# Altium PCB Adapter_MPCIe_to_M2_E.PcbDoc
Units mm, origin at the board's own origin, x right, y up, seen from the top; angles counter-clockwise.
Board outline 50.95 x 30 mm, 4 copper layers (01_Top, 02_GND, 03_GND, 04_Bottom), stack 1.002 mm thick; 26 components, 38 nets, 200 pads, 585 vias.
Unrouted connection lines stored in the file: 36.
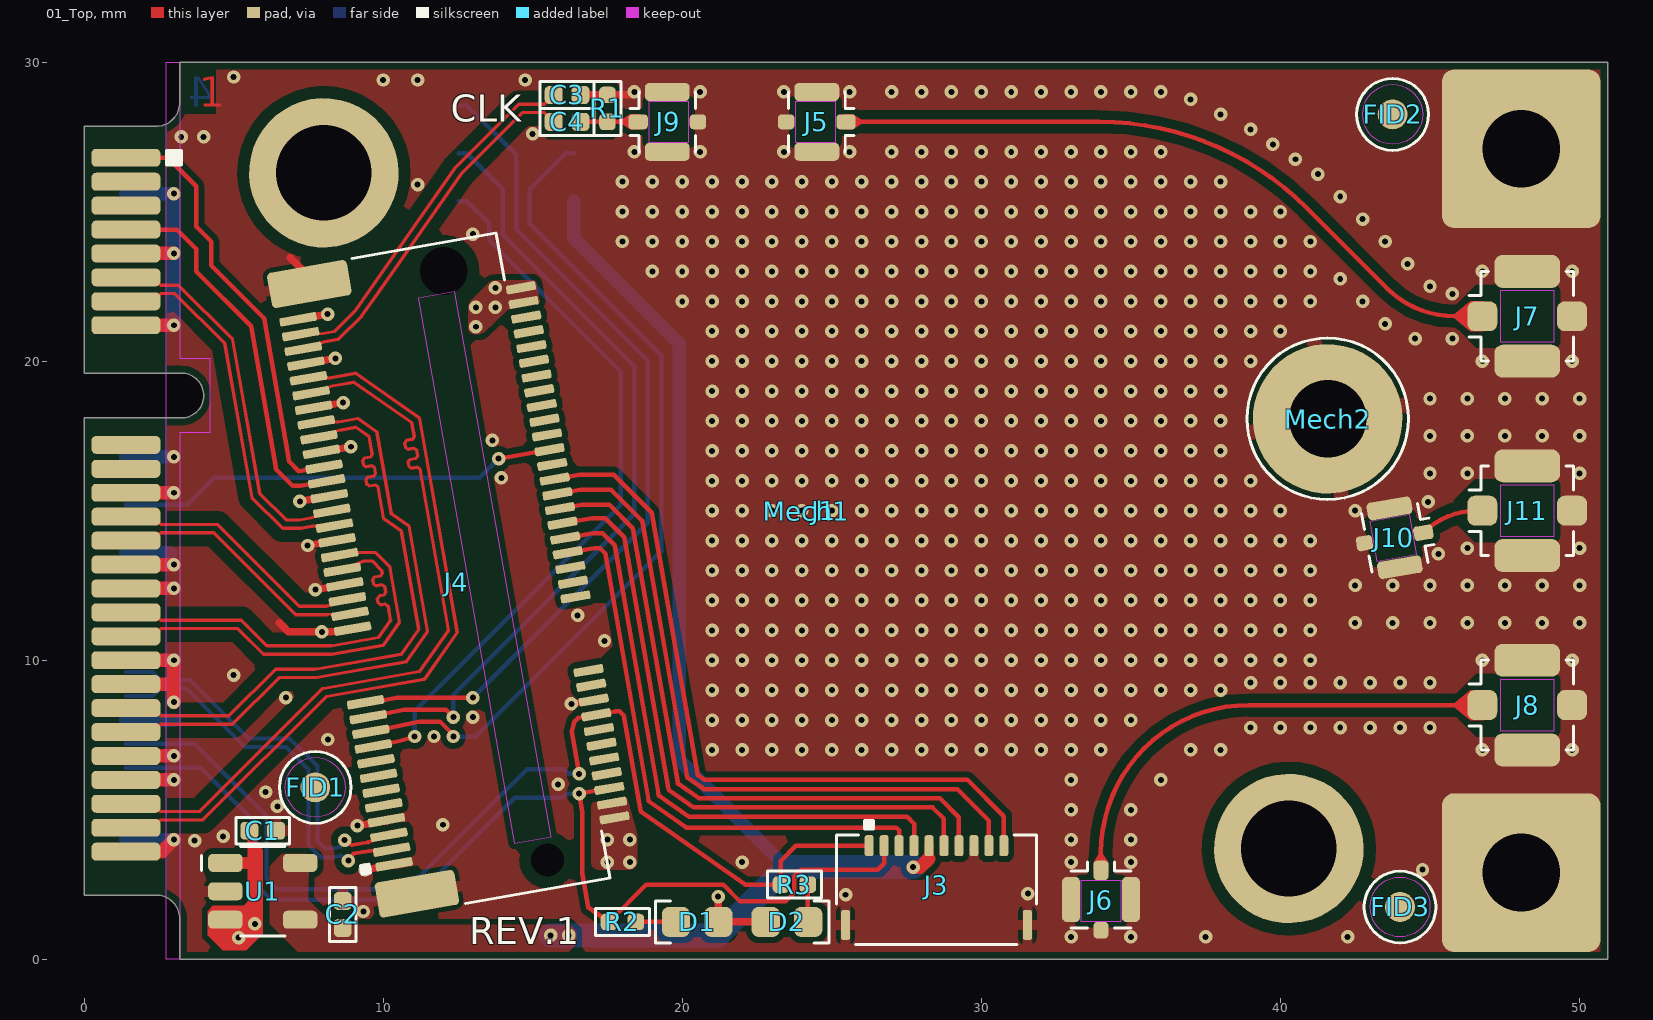
[diagram p0: 01_Top view]
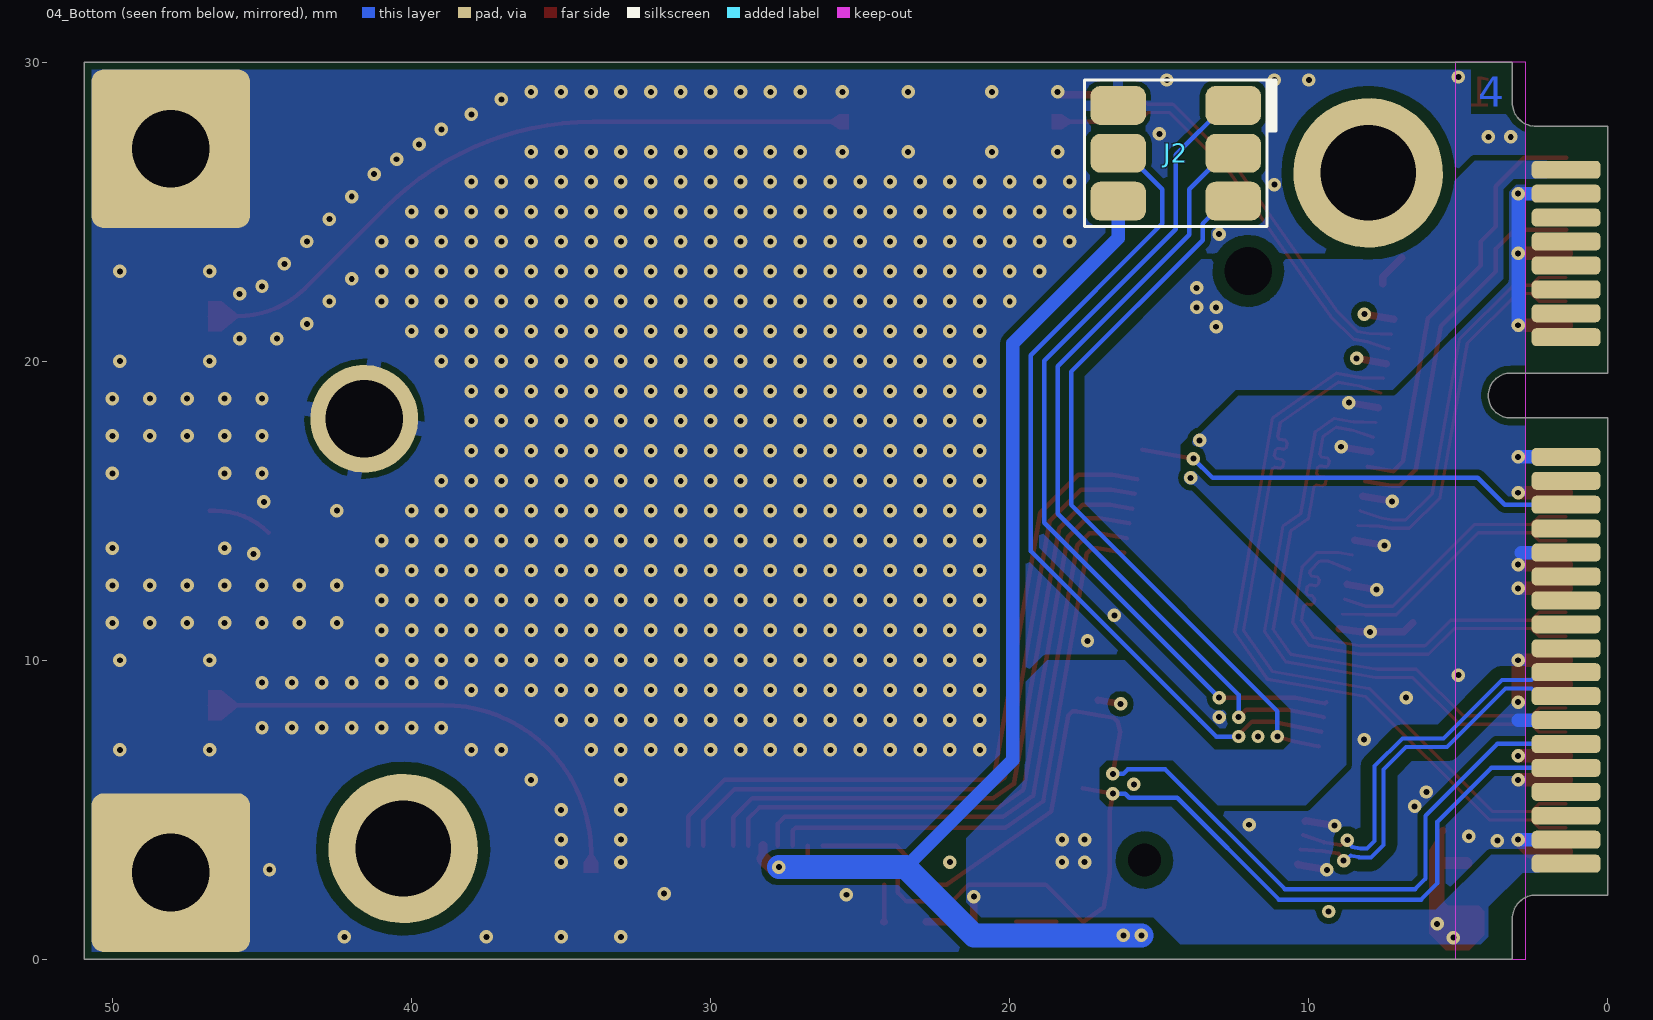
[diagram p1: 04_Bottom view, seen from below]
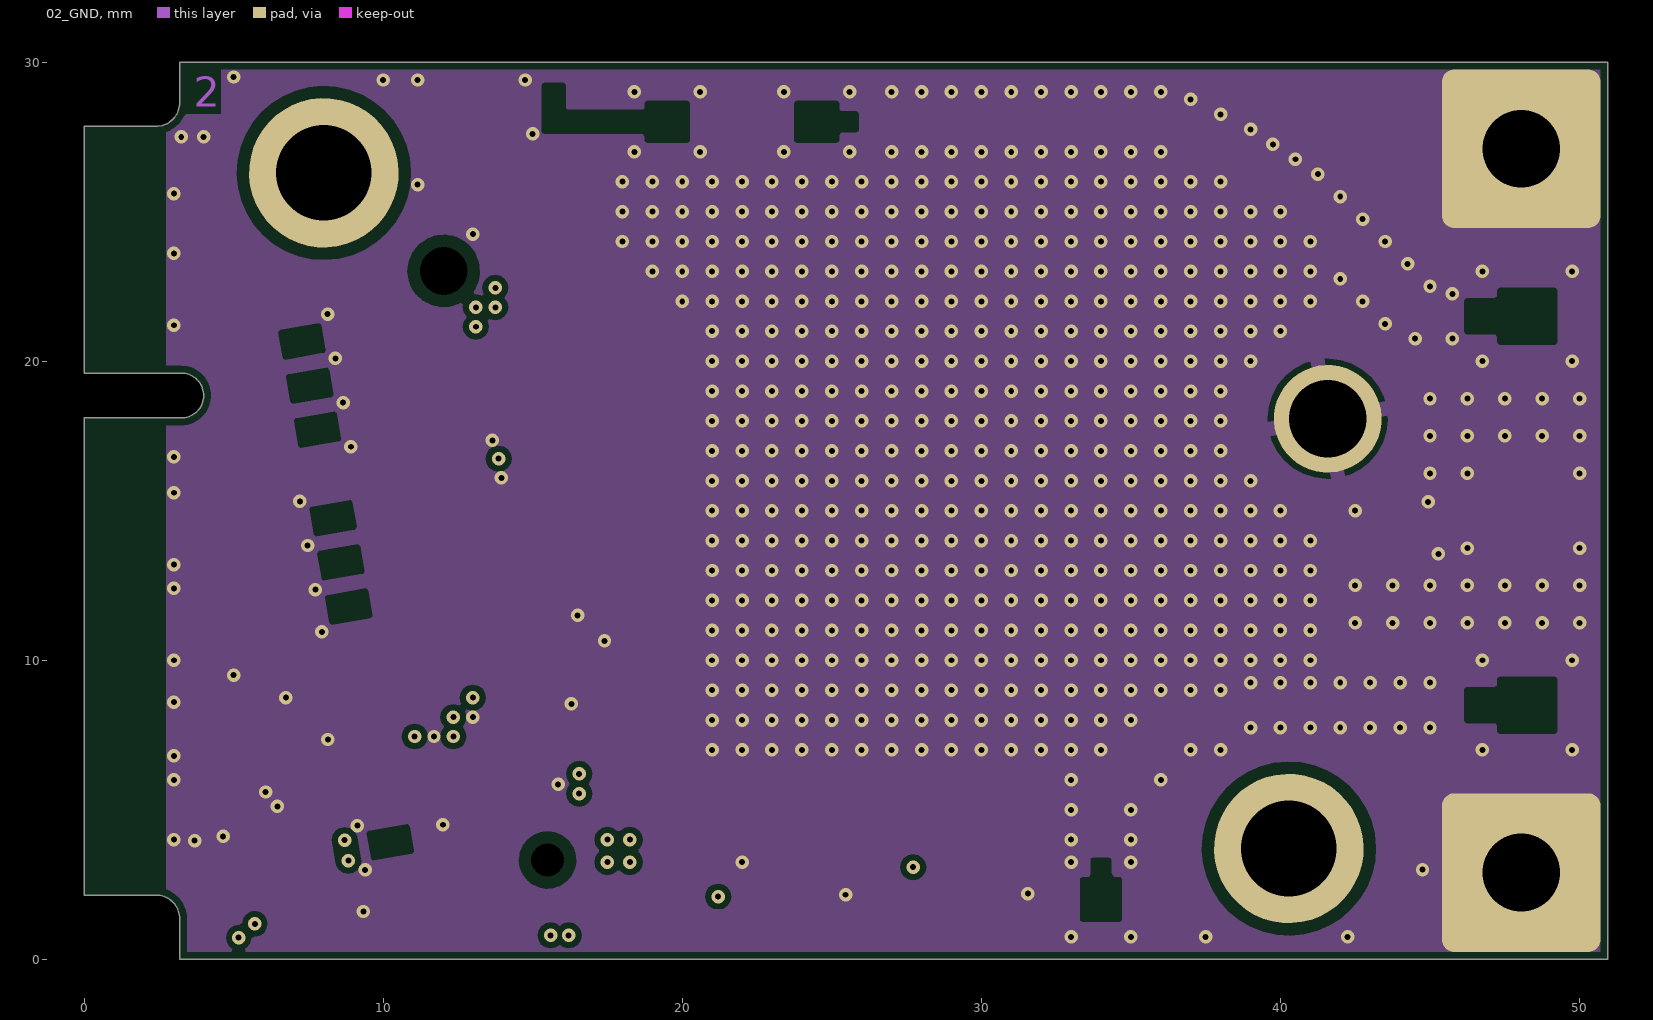
[diagram p2: 02_GND]
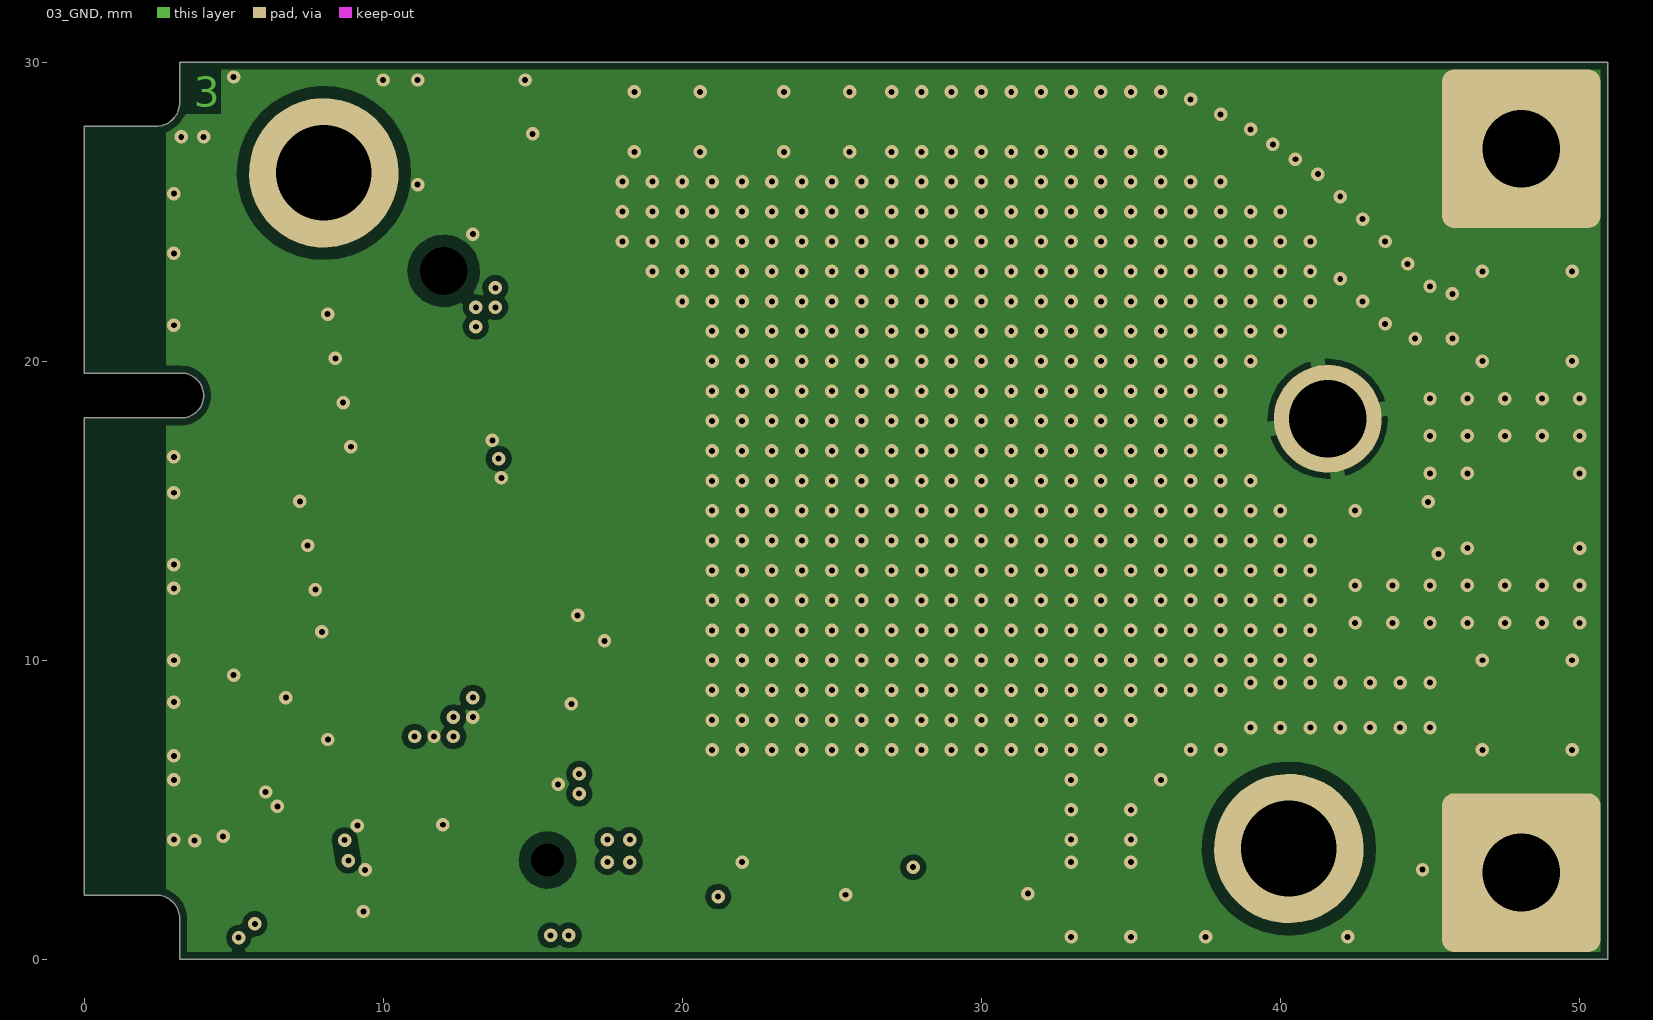
[diagram p3: 03_GND]
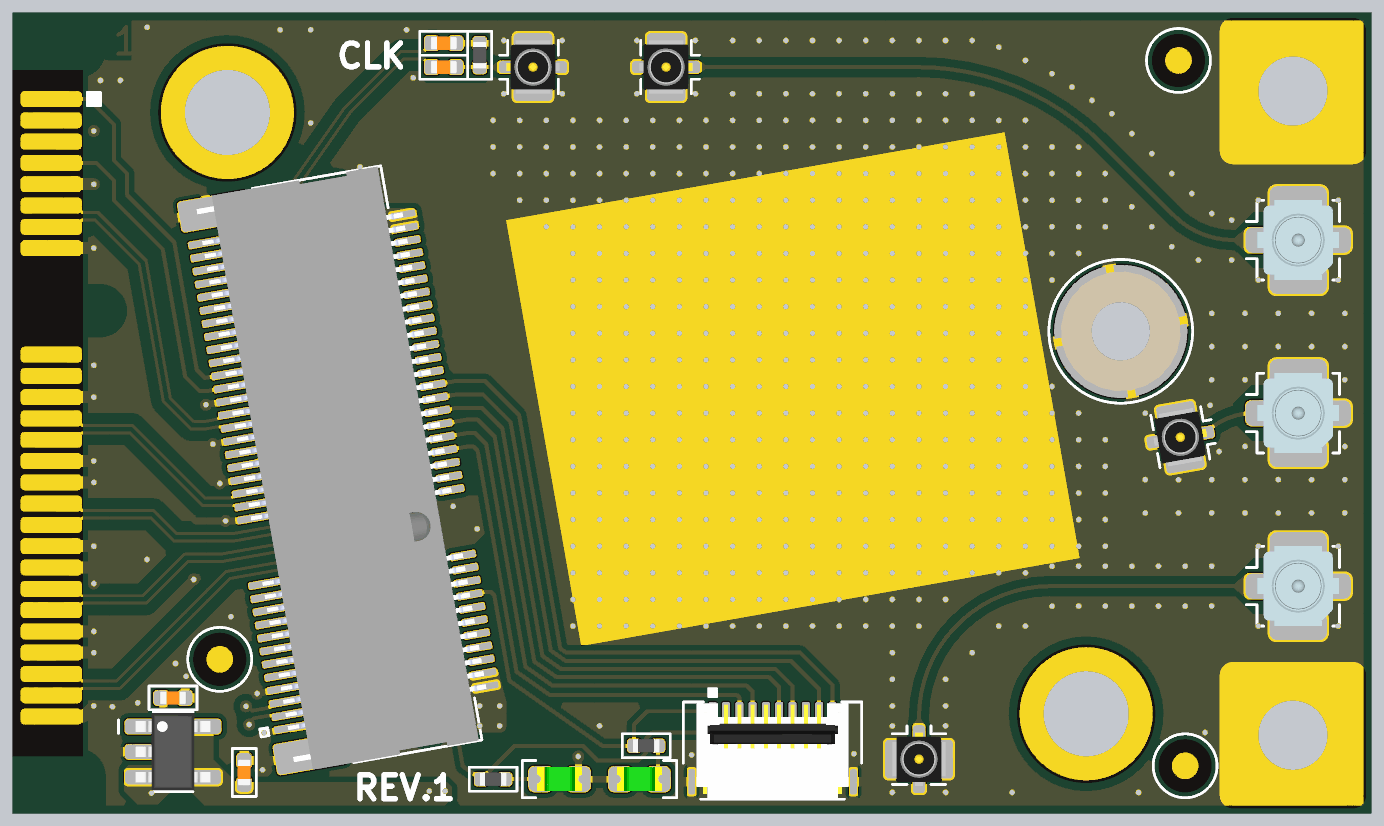
[diagram p4: 3D render of the assembled board from above, using the file's embedded part models]

## Layer stack, top to bottom
Top Solder: solder mask 0.01, Solder Resist, Dk 4
01_Top: signal copper 0.038
C_01_S1000H 1x3313 (18): core 0.1, PP-006, Dk 4.41
02_GND: signal copper 0.018
PP_01_S1000HB 7628 (46): prepreg 0.195, PP-006, Dk 4.66
C_02_S1000H 2x1506 (18): core 0.3, FR-4, Dk 4.69
PP_02_S1000HB 7628 (46): prepreg 0.195, PP-006, Dk 4.66
03_GND: signal copper 0.018
C_03_S1000H 1x3313 (18): core 0.1, PP-006, Dk 4.41
04_Bottom: signal copper 0.038
Bottom Solder: solder mask 0.01, Solder Resist, Dk 4

## Board outline
0,2.15 0,18.1 3.25,18.1 ccw(c3.25,18.85) 3.25,19.6 0,19.6 0,27.85 2.4,27.85 ccw(c2.4,28.65) 3.2,28.65 3.2,30 50.95,30 50.95,0 3.2,0 3.2,1.35 ccw(c2.4,1.35) 2.4,2.15

## Design rules (kind name [scope] priority, off if disabled: settings)
BoardOutlineClearance BOC_J1 [InComponent('J1')] p1: gap=0.25 ignorepadtopadclearanceinfootprint=FALSE except(0: Arc-SplitContinuation Track-SplitContinuation SMDPad-SplitContinuation THPad-SplitContinuation Via-SplitContinuation Fill-SplitContinuation Poly-SplitContinuation Region-SplitContinuation Text-SplitContinuation)
BoardOutlineClearance BOC_MH_BRD [InPadClass('MH_BRD')] p2: gap=0 ignorepadtopadclearanceinfootprint=FALSE
BoardOutlineClearance BOC_Default [All] p3: gap=0.25 ignorepadtopadclearanceinfootprint=FALSE except(0: Arc-SplitContinuation Track-SplitContinuation SMDPad-SplitContinuation THPad-SplitContinuation Via-SplitContinuation Fill-SplitContinuation Poly-SplitContinuation Region-SplitContinuation Text-SplitContinuation)
Clearance C_FID [IsKeepOut vs InPadClass('FID')] p1: gap=0 ignorepadtopadclearanceinfootprint=FALSE
Clearance C_conn_RF [IsKeepOut vs InComponent('J5') or InComponent('J6') or InComponent('J7') or InComponent('J8')  or InComponent('J9')    or InComponent('J10') or InComponent('J11')] p2: gap=0 ignorepadtopadclearanceinfootprint=FALSE
Clearance C_50_Ohm [InNetClass('50_Ohm_CP')] p3: gap=0.1 ignorepadtopadclearanceinfootprint=FALSE except(0: Arc-Hole Track-Hole SMDPad-Hole THPad-Hole Via-Hole Fill-Hole Poly-Hole Region-Hole Text-Hole; 0.2: SMDPad-Fill SMDPad-Poly SMDPad-Region THPad-Fill THPad-Poly THPad-Region Via-Fill Via-Poly Via-Region Fill-Fill Fill-Poly Fill-Region Poly-Poly Poly-Region Region-Region; 0.3: Arc-Poly Track-Poly)
Clearance C_J4 [IsKeepOut vs InComponent('J4')] p4: gap=0 ignorepadtopadclearanceinfootprint=FALSE
Clearance C_MH_KP [IsKeepOut vs InPadClass('MH')] p5: gap=0 ignorepadtopadclearanceinfootprint=FALSE
Clearance C_Diff [InDifferentialPairClass('90_Ohm') or InDifferentialPairClass('100_Ohm')] p6: gap=0.1 ignorepadtopadclearanceinfootprint=FALSE except(0: Arc-Hole Track-Hole SMDPad-Hole THPad-Hole Via-Hole Fill-Hole Poly-Hole Region-Hole Text-Hole; 0.2: SMDPad-Fill SMDPad-Poly SMDPad-Region THPad-Fill THPad-Poly THPad-Region Via-Fill Via-Poly Via-Region Fill-Fill Fill-Poly Fill-Region Poly-Poly Poly-Region Region-Region; 0.4: Arc-Fill Arc-Poly Arc-Region Track-Fill Track-Poly Track-Region)
Clearance C_MH [InPadClass('MH')] p7: gap=0.4 ignorepadtopadclearanceinfootprint=FALSE
Clearance C_Default [All] p8: gap=0.1 ignorepadtopadclearanceinfootprint=FALSE except(0: Arc-Hole Track-Hole SMDPad-Hole THPad-Hole Via-Hole Fill-Hole Poly-Hole Region-Hole Text-Hole; 0.2: Arc-Fill Arc-Poly Track-Fill Track-Poly SMDPad-Fill SMDPad-Poly THPad-Fill THPad-Poly Via-Fill Via-Poly Fill-Fill Fill-Poly Poly-Poly Poly-Region)
ComponentClearance [All] p1: gap=0 collisioncheckmode=3 verticalgap=0 showdistances=FALSE
DiffPairsRouting DP_90_Ohm [InDifferentialPairClass('90_Ohm')] p1: maxlimit=0.155 minlimit=0.155 mostfreqgap=0.155 toplayer_minwidth=0.135 toplayer_maxwidth=0.135 toplayer_prefwidth=0.135 midlayer1_minwidth=0.135 midlayer1_maxwidth=0.135 midlayer1_prefwidth=0.135 midlayer2_minwidth=0.135 midlayer2_maxwidth=0.135 midlayer2_prefwidth=0.135 bottomlayer_minwidth=0.135 bottomlayer_maxwidth=0.135 bottomlayer_prefwidth=0.135 maxuncoupledlength=5
DiffPairsRouting DP_100_Ohm [InDifferentialPairClass('100_Ohm')] p2: maxlimit=0.17 minlimit=0.17 mostfreqgap=0.17 toplayer_minwidth=0.11 toplayer_maxwidth=0.11 toplayer_prefwidth=0.11 midlayer1_minwidth=0.11 midlayer1_maxwidth=0.11 midlayer1_prefwidth=0.11 midlayer2_minwidth=0.11 midlayer2_maxwidth=0.11 midlayer2_prefwidth=0.11 bottomlayer_minwidth=0.11 bottomlayer_maxwidth=0.11 bottomlayer_prefwidth=0.11 maxuncoupledlength=5
HoleSize [All] p1: absolutevalues=TRUE maxlimit=5 minlimit=0.1 maxpercent=80.000 minpercent=20.000
HoleToHoleClearance [All] p1: gap=0.2 allowstackedmicrovias=TRUE
MatchedLengths [InDifferentialPairClass('All Differential Pairs')] p1: tolerance=0.1 checknetsindiffpair=TRUE checkdiffpairvsdiffpair=FALSE checkxsignals=FALSE checkothers=FALSE
MinimumSolderMaskSliver [All] p1: minsoldermaskwidth=0.099
PolygonConnect [(ObjectKind = 'Poly') And (Name = 'Direct')] p1: connectstyle=Direct reliefconductorwidth=0.254 reliefentries=4 polygonreliefangle="90 Angle" airgapwidth=0.254
PolygonConnect PC_Polygon_Direct [InNamedPolygon('Direct')    or InComponent('J10') or InComponent('J11')] p2: connectstyle=Direct reliefconductorwidth=0.254 reliefentries=4 polygonreliefangle="90 Angle" airgapwidth=0.254
PolygonConnect PC_Default [All] p3: thpad.connectstyle=Relief thpad.reliefconductorwidth=0.5 thpad.reliefentries=4 thpad.polygonreliefangle="90 Angle" thpad.airgapwidth=0.2 smdpad.connectstyle=Relief smdpad.reliefconductorwidth=0.35 smdpad.reliefentries=4 smdpad.polygonreliefangle="90 Angle" smdpad.airgapwidth=0.15 via.connectstyle=Direct via.reliefconductorwidth=0.254 via.reliefentries=4 via.polygonreliefangle="90 Angle" via.airgapwidth=0.254
RoutingVias [All] p1: holewidth=0.2 width=0.45 viastyle="Through Hole" minholewidth=0.2 minwidth=0.4 maxholewidth=0.3 maxwidth=0.6
SilkToSilkClearance [All] p1: silktosilkclearance=0
SilkToSolderMaskClearance [IsPad] p1: minsilkscreentomaskgap=0 clearancetoexposedcopper=TRUE
SolderMaskExpansion [All] p1: expansion=0.05 istentingtop=FALSE
Width 50_Ohm_CP [InNetClass('50_Ohm_CP')] p1: maxlimit=0.254 minlimit=0.15 preferedwidth=0.254 toplayer_maxwidth=0.15 toplayer_prefwidth=0.15 midlayer1_minwidth=0.254 midlayer2_minwidth=0.254 bottomlayer_minwidth=0.254 minimp=50.000000 maximp=50.000000 favimp=50.000000
Width [All] p2: maxlimit=0.8 minlimit=0.1 preferedwidth=0.15
23 further rules are at their usual default settings.

## Classes and differential pairs
net class 50_Ohm_CP: NetJ5_1 NetJ6_1 NetJ10_1 REFCLK1
differential pair class 90_Ohm: USB_D
differential pair class 100_Ohm: PCI_REF_CLK PCI_RX0 PCI_RX1 PCI_TX0 PCI_TX1 REFCLK1
pad class FID: FID1-FID FID2-FID FID3-FID
pad class MH: J4-MH Mech1-MH
differential pair REFCLK1: +REFCLK1_P -REFCLK1_N
differential pair PCI_TX1: +PCI_TX1_P -PCI_TX1_N
differential pair PCI_TX0: +PCI_TX0_P -PCI_TX0_N
differential pair PCI_RX1: +PCI_RX1_P -PCI_RX1_N
differential pair PCI_RX0: +PCI_RX0_P -PCI_RX0_N
differential pair PCI_REF_CLK: +PCI_REF_CLK_P -PCI_REF_CLK_N
differential pair USB_D: +USB_D_P -USB_D_N

## Components (designator, comment, footprint, x,y, rotation, side; value= is the part's Value field where it differs from the comment)
C1 "GRM155R71E104KE14D" CAPC100X50X55L25N 5.975,4.3 r180 top value=0.1u
C2 "GRM155R71E104KE14D" CAPC100X50X55L25N 8.65,1.5 r270 top value=0.1u
C3 "GRM155R71E104KE14D" CAPC100X50X55L25N 16.15,28.9 r180 top value=0.1u
C4 "GRM155R71E104KE14D" CAPC100X50X55L25N 16.15,28 r180 top value=0.1u
D1 "LTST-C190KGKT" LEDC160X80X80L40N-Green 20.5,1.25 r0 top value=Green
D2 "LTST-C190KGKT" LEDC160X80X80L40N-Green 23.5,1.25 r180 top value=Green
FID1 "Fiducial" FIDUCIAL_2D 7.731,5.75 r0 top
FID2 "Fiducial" FIDUCIAL_2D 43.75,28.25 r0 top
FID3 "Fiducial" FIDUCIAL_2D 44,1.75 r0 top
J1 "Edge connector PCIe MiniCard" EDGE_CONN_PCIE_MINICARD 0,0 r0 top locked value="PCIe MiniCard"
J2 "788641001_Mating" Molex_788641001_Mating 14.45,26.95 r270 bottom locked value=788641001
J3 "5034801000" MOLEX_5034801000 28.5,0.5 r0 top
J4 "SM3ZS067U215AER1500" JAE_SM3ZS067U215AER1500 13.76,13.168 r100 top
J5 "CONMHF4-SMD-G-T" LINX_CONMHF4-SMD-G-T 24.5,28 r90 top value=MHF4
J6 "CONMHF4-SMD-G-T" LINX_CONMHF4-SMD-G-T 34,2 r180 top value=MHF4
J7 "0734120110" MOLEX_734120110 48.25,21.5 r270 top
J8 "0734120110" MOLEX_734120110 48.25,8.5 r270 top
J9 "CONMHF4-SMD-G-T" LINX_CONMHF4-SMD-G-T 19.5,28 r270 top value=MHF4
J10 "CONMHF4-SMD-G-T" LINX_CONMHF4-SMD-G-T 43.82,14.094 r100 top value=MHF4
J11 "0734120110" MOLEX_734120110 48.25,15 r270 top
Mech1 "960-21-12-D-AB-0" WAKEFIELD_960-21-12-D-AB-0 24.15,15 r100 top locked
Mech2 "SM3ZS067U215-NUT1-R2500" JAE_SM3ZS067U215-NUT1 41.581,18.074 r100 top
R1 "Res-0402-1K-5%" RESC100X50X40L20N 17.5,28.45 r90 top value=1K
R2 "Res-0402-1K-5%" RESC100X50X40L20N 18,1.25 r0 top value=1K
R3 "Res-0402-1K-5%" RESC100X50X40L20N 23.75,2.5 r0 top value=1K
U1 "TPS7A2018PDBVR" SOT23-5P95_280X145L45X40N 5.975,2.275 r0 top

## Footprints (in the part's own frame and the unit in brackets; to place one, negate y for a bottom-side part, rotate by r counter-clockwise, add the part's x,y. Pads: shape width x height; smd on the part's side, far side on the other; paste and mask are expansions set on the pad)
CAPC100X50X55L25N [mm] "Capacitor, Chip 0402; 1.00 mm L X 0.50 mm W X 0.55 mm H body"
  rrect50% 0.6x0.6 smd paste-0.025 mask+0.05: 1(-0.45,0) 2(0.45,0)
  silkscreen extent -0.9,-0.45 0.9,0.45, body extent -0.5,-0.25 0.5,0.25, height 0.55
EDGE_CONN_PCIE_MINICARD [mm]
  rrect50% 2.3x0.6 smd paste-99 mask-99: 1(1.4,26.8) 3(1.4,26) 5(1.4,25.2) 7(1.4,24.4) 9(1.4,23.6) 11(1.4,22.8) 13(1.4,22) 15(1.4,21.2) 17(1.4,17.2) 19(1.4,16.4) 21(1.4,15.6) 23(1.4,14.8) 25(1.4,14) 27(1.4,13.2) 29(1.4,12.4) 31(1.4,11.6) 33(1.4,10.8) 35(1.4,10) 37(1.4,9.2) 39(1.4,8.4) 41(1.4,7.6) 43(1.4,6.8) 45(1.4,6) 47(1.4,5.2) 49(1.4,4.4) 51(1.4,3.6)
  rrect50% 2.3x0.6 smd far side paste-99 mask-99: 2(1.4,26.4) 4(1.4,25.6) 6(1.4,24.8) 8(1.4,24) 10(1.4,23.2) 12(1.4,22.4) 14(1.4,21.6) 16(1.4,20.8) 18(1.4,16.8) 20(1.4,16) 22(1.4,15.2) 24(1.4,14.4) 26(1.4,13.6) 28(1.4,12.8) 30(1.4,12) 32(1.4,11.2) 34(1.4,10.4) 36(1.4,9.6) 38(1.4,8.8) 40(1.4,8) 42(1.4,7.2) 44(1.4,6.4) 46(1.4,5.6) 48(1.4,4.8) 50(1.4,4) 52(1.4,3.2)
  rrect15% 5.3x5.3 hole 2.6 paste-99 mask+0.1: SH(48.05,2.9) SH(48.05,27.1)
  01_Top keep-out region: 2.75,30 3.2,30 3.2,20.1 4.2,20.1 4.2,17.6 3.2,17.6 3.2,0 2.75,0
  04_Bottom keep-out region: 2.75,30 5.1,30 5.1,0 2.75,0
  silkscreen extent 2.75,26.55 3.25,27.05
FIDUCIAL_2D [mm]
  round 1 smd paste-99 mask+0.5: FID(0,0)
  01_Top keep-out region: 1,0 0.924,-0.383 0.707,-0.707 0.383,-0.924 0,-1 0,-1 -0.383,-0.924 -0.707,-0.707 -0.924,-0.383 -1,0 -1,0 -0.924,0.383 -0.707,0.707 -0.383,0.924 0,1 0,1 0.383,0.924 0.707,0.707 0.924,0.383 1,0
  silkscreen extent -1.2,-1.2 1.2,1.2
JAE_SM3ZS067U215-NUT1 [mm]
  round 5 / inner round 3.6 / far side round 3.6 hole 2.6 paste-99 mask+0.05: SH(0,0)
  silkscreen extent -2.7,-2.7 2.7,2.7, body extent -2.24,-2.25 2.24,2.25, height 1
JAE_SM3ZS067U215AER1500 [mm]
  rrect50% 0.3x1.25 smd paste-0.025 mask+0.05: 1(-9.25,5.075) 3(-8.75,5.075) 5(-8.25,5.075) 7(-7.75,5.075) 9(-7.25,5.075) 11(-6.75,5.075) 13(-6.25,5.075) 15(-5.75,5.075) 17(-5.25,5.075) 19(-4.75,5.075) 21(-4.25,5.075) 23(-3.75,5.075) 33(-1.25,5.075) 35(-0.75,5.075) 37(-0.25,5.075) 39(0.25,5.075) 41(0.75,5.075) 43(1.25,5.075) 45(1.75,5.075) 47(2.25,5.075) 49(2.75,5.075) 51(3.25,5.075) 53(3.75,5.075) 55(4.25,5.075) 57(4.75,5.075) 59(5.25,5.075) 61(5.75,5.075) 63(6.25,5.075) 65(6.75,5.075) 67(7.25,5.075) 69(7.75,5.075) 71(8.25,5.075) 73(8.75,5.075) 75(9.25,5.075)
  rrect50% 0.3x1 smd paste-0.025 mask+0.05: 2(-9,-2.45) 4(-8.5,-2.45) 6(-8,-2.45) 8(-7.5,-2.45) 10(-7,-2.45) 12(-6.5,-2.45) 14(-6,-2.45) 16(-5.5,-2.45) 18(-5,-2.45) 20(-4.5,-2.45) 22(-4,-2.45) 32(-1.5,-2.45) 34(-1,-2.45) 36(-0.5,-2.45) 38(0,-2.45) 40(0.5,-2.45) 42(1,-2.45) 44(1.5,-2.45) 46(2,-2.45) 48(2.5,-2.45) 50(3,-2.45) 52(3.5,-2.45) 54(4,-2.45) 56(4.5,-2.45) 58(5,-2.45) 60(5.5,-2.45) 62(6,-2.45) 64(6.5,-2.45) 66(7,-2.45) 68(7.5,-2.45) 70(8,-2.45) 72(8.5,-2.45) 74(9,-2.45)
  round 0 hole 1.1 unplated paste-1 mask+0.1: MH(-10,0)
  round 0 hole 1.6 unplated paste-1 mask+0.1: MH(10,0)
  rrect25% 1.2x2.7 smd paste-0.025 mask+0.05: SH(-10.35,4.5) SH(10.35,4.5)
  01_Top keep-out region: -9.25,-0.25 9.25,-0.25 9.25,1 -9.25,1
  silkscreen extent -10.95,-1.95 10.95,6.2, body extent -10.95,-2.45 10.95,5.15, height 2.13
LEDC160X80X80L40N-Green [mm] "Led, Chip 0603; 1.60 mm L X 0.80 mm W X 0.80 mm H body"
  rrect50% 0.95x1 smd paste-0.025 mask+0.05: A(0.71,0) C(-0.71,0)
  silkscreen extent -1.4,-0.7 -0.9,0.7, body extent -0.85,-0.45 0.85,0.45, height 0.9
LINX_CONMHF4-SMD-G-T [mm]
  rrect50% 0.5x0.65 smd paste-0.025 mask+0.05: 1(0,-0.975)
  rrect50% 0.6x1.5 smd paste-0.025 mask+0.05: SH(-1,0) SH(1,0)
  rrect50% 0.5x0.55 smd paste-0.025 mask+0.05: SH(0,1.025)
  01_Top keep-out region: -0.675,-0.625 0.675,-0.625 0.675,0.725 -0.675,0.725
  silkscreen extent -1,-1.25 1,0.95, body extent -1,-1 1,1, height 0.86
MOLEX_734120110 [mm]
  rrect50% 1x1 smd paste-0.025 mask+0.05: 1(0,-1.5) SH(0,1.5)
  rrect50% 1.1x2.2 smd paste-0.025 mask+0.05: SH(-1.5,0) SH(1.5,0)
  01_Top keep-out region: -0.85,-0.9 0.85,-0.9 0.85,0.9 -0.85,0.9
  silkscreen extent -1.5,-1.95 1.5,1.55, body extent -1.5,-1.54 1.5,1.54, height 1.25
Molex_788641001_Mating [mm]
  rrect50% 1.3x1.85 smd paste-99 mask+0.05: 1(-1.6,1.925) 2(0,1.925) 3(1.6,1.925) 4(1.6,-1.925) 5(0,-1.925) 6(-1.6,-1.925)
  silkscreen extent -2.45,-3.05 2.45,3.35
MOLEX_5034801000 [mm]
  rrect50% 0.3x0.7 smd: 1(-2.25,3.3) 2(-1.75,3.3) 3(-1.25,3.3) 4(-0.75,3.3) 5(-0.25,3.3) 6(0.25,3.3) 7(0.75,3.3) 8(1.25,3.3) 9(1.75,3.3) 10(2.25,3.3)
  rrect50% 0.3x1 smd paste-0.025 mask+0.05: SH(-3.04,0.65) SH(3.04,0.65)
  silkscreen extent -3.35,0 3.35,4.15, body extent -2.85,0 2.85,3.6, height 1.85
RESC100X50X40L20N [mm] "Resistor, Chip 0402; 1.00 mm L X 0.50 mm W X 0.40 mm H body"
  rrect50% 0.55x0.55 smd paste-0.025 mask+0.05: 1(-0.45,0) 2(0.45,0)
  silkscreen extent -0.9,-0.45 0.9,0.45, body extent -0.5,-0.25 0.5,0.25, height 0.4
SOT23-5P95_280X145L45X40N [mm] "Small Outline Transistor (SOT23), 0.95 mm pitch; 5 pin, 2.90 mm L X 1.60 mm W X 1.45 mm H body"
  rrect50% 1.15x0.6 smd paste-0.025 mask+0.05: 1(-1.25,0.95) 2(-1.25,0) 3(-1.25,-0.95) 4(1.25,-0.95) 5(1.25,0.95)
  silkscreen extent -2.05,-1.5 0.75,1.5, body extent -1.4,-1.45 1.4,1.45, height 1.45
WAKEFIELD_960-21-12-D-AB-0 [mm]
  round 5 hole 3.2 unplated paste-99 mask+0.1: MH(-13.925,-13.925) MH(13.925,13.925)
  body extent -17.35,-17.35 17.35,17.35, height 12.65

## Part data
C1 C2 C3 C4: "Capacitor, 0.1u, 25V, 10%, X7R, 0402", Manufacturer="Murata Electronics"
D1 D2: "LED Diode, Green, -30/+85, SMD0603", Manufacturer="Lite-On Inc."
J2: "Conn, Mating, 788641001", Manufacturer=Molex
J3: "Conn, FFC, 10 pins, 0.5mm, -40/+85, Right, SMD", Manufacturer=Molex
J4: "Conn M.2, Key E, -40/+80, SMD", Manufacturer=JAE
J5 J6 J9 J10: "Conn, IPEX MHF4, Male Pin, 50 Ohm, -65/+165, SMD", Manufacturer="Linx Technologies Inc.", Name=CONMHF4-SMD-G-T
J7 J8 J11: "Conn, U.FL (UMCC), Male Pin, 50 Ohm, -40/+90, SMD", Manufacturer=Molex
Mech1: "Mech, Heatsink, 21x12 mm, front, push pins", Manufacturer=Wakefield
Mech2: "Mech, standoff, M2, 0.35 mm", Manufacturer=JAE
R1 R2 R3: "Resistor, 1K, 0.063W, 5%, 0402"
U1: "IC, VolReg, DC/DC, 2.2/5.5V, 1.8V, 0.25A, -40/+125, 4-X2SON", Manufacturer="Texas Instruments"

## Via types
v1: diameter 0.45, hole 0.2, 01_Top to 04_Bottom, tented both sides, 585 vias

## Nets (pads, with @x,y where several pads share a name; then routed paths per layer and width w, separated by ;. In a path a pad name is that pad's centre, name@x,y a point inside that pad or via, vN(x,y) a via of type N, cw(c..) or ccw(c..) an arc to the next point about the centre after c; other vN are vias at no path point)
CLK_REQUEST#: J1.7 J4.53 | length 12.8
  01_Top w0.15: J1.7 3.1,24.4 3.75,23.75 3.75,23 5.587,21.163 6.432,16.368 6.973,15.827 7.245,15.827 J4.53
GND: C1.1 C2.1 C3.1 J1.4 J1.9 J1.15 J1.18 J1.21 J1.26 J1.27 J1.29 J1.35 J1.37 J1.40 J1.43 J1.45 J1.50 J1.51 J1.SH J2.6 J3.8 J3.SH J4.1 J4.7 J4.18 J4.33 J4.39 J4.45 J4.51 J4.57 J4.63 J4.69 J4.75 J4.SH J5.SH J6.SH J7.SH J8.SH J9.SH J10.SH J11.SH Mech2.SH R1.2 U1.2 | length 45.2
  01_Top w0.25: 6.525,11.25 6.825,10.95 v1(7.95,10.95) 8.3,10.95 J4.33 ; 6.9,23.45 7.531,22.819 J4.SH@7.531,22.579 ; J4.75 v1(8.141,21.57) ; v1(7.213,15.314) J4.51 ; J4.69 v1(8.401,20.093) ; v1(7.474,13.837) J4.45 ; J4.63 v1(8.662,18.615) ; v1(7.734,12.359) J4.39 ; J4.57 v1(8.922,17.138) ; v1(9.138,4.467) 10.095,4.636 J4.7@10.114,4.623 ; v1(9.398,2.99) 10.356,3.159 J4.1 ; v1(16.296,8.538) J4.18 ; C3.1 18.3,28.9 v1(18.4,29)
  01_Top w0.45: J1.51 2.6,3.6 v1(3,4) ; J1.45 v1(3,6) ; J1.43 v1(3,6.8) ; J1.37 3,9.2 ; J1.35 v1(3,10) 3,9.2 ; J1.29 v1(3,12.4) ; J1.27 v1(3,13.2) ; J1.21 v1(3,15.6) ; J1.15 v1(3,21.2) ; J1.9 v1(3,23.6) ; v1(3,8.6) 3,9.2
  04_Bottom w0.45: J1.50 v1(3,4) ; J1.40 3,8 ; J1.26 2.65,13.6 2.905,13.6 ; J1.18 v1(3,16.8) ; J1.4 v1(3,25.6) v1(3,23.6) v1(3,21.2)
  other v1: 33,0.75 35,0.75 37.5,0.75 42.25,0.75 9.337,1.599 25.459,2.16 31.559,2.199 44.75,3 22,3.25 33,3.25 35,3.25 3.698,3.971 33,4 35,4 4.653,4.114 12,4.5 33,5 35,5 6.464,5.114 6.069,5.595 15.85,5.85 33,6 36,6 21,7 22,7 23,7 24,7 25,7 26,7 27,7 28,7 29,7 30,7 31,7 32,7 33,7 34,7 37,7 38,7 46.75,7 49.75,7 8.15,7.35 11.7,7.45 39,7.75 40,7.75 41,7.75 42,7.75 43,7.75 44,7.75 45,7.75 21,8 22,8 23,8 24,8 25,8 26,8 27,8 28,8 29,8 30,8 31,8 32,8 33,8 34,8 35,8 13,8.1 6.75,8.75 21,9 22,9 23,9 24,9 25,9 26,9 27,9 28,9 29,9 30,9 31,9 32,9 33,9 34,9 35,9 36,9 37,9 38,9 39,9.25 40,9.25 41,9.25 42,9.25 43,9.25 44,9.25 45,9.25 5,9.5 21,10 22,10 23,10 24,10 25,10 26,10 27,10 28,10 29,10 30,10 31,10 32,10 33,10 34,10 35,10 36,10 37,10 38,10 39,10 40,10 41,10 46.75,10 49.75,10 17.4,10.65 21,11 22,11 23,11 24,11 25,11 26,11 27,11 28,11 29,11 30,11 31,11 32,11 33,11 34,11 35,11 36,11 37,11 38,11 39,11 40,11 41,11 42.5,11.25 43.75,11.25 45,11.25 46.25,11.25 47.5,11.25 48.75,11.25 50,11.25 16.5,11.5 21,12 22,12 23,12 24,12 25,12 26,12 27,12 28,12 29,12 30,12 31,12 32,12 33,12 34,12 35,12 36,12 37,12 38,12 39,12 40,12 41,12 42.5,12.5 43.75,12.5 45,12.5 46.25,12.5 47.5,12.5 48.75,12.5 50,12.5 21,13 22,13 23,13 24,13 25,13 26,13 27,13 28,13 29,13 30,13 31,13 32,13 33,13 34,13 35,13 36,13 37,13 38,13 39,13 40,13 41,13 45.277,13.557 46.25,13.75 50,13.75 21,14 22,14 23,14 24,14 25,14 26,14 27,14 28,14 29,14 30,14 31,14 32,14 33,14 34,14 35,14 36,14 37,14 38,14 39,14 40,14 41,14 21,15 22,15 23,15 24,15 25,15 26,15 27,15 28,15 29,15 30,15 31,15 32,15 33,15 34,15 35,15 36,15 37,15 38,15 39,15 40,15 42.5,15 44.938,15.297 21,16 22,16 23,16 24,16 25,16 26,16 27,16 28,16 29,16 30,16 31,16 32,16 33,16 34,16 35,16 36,16 37,16 38,16 39,16 13.95,16.1 45,16.25 46.25,16.25 50,16.25 21,17 22,17 23,17 24,17 25,17 26,17 27,17 28,17 29,17 30,17 31,17 32,17 33,17 34,17 35,17 36,17 37,17 38,17 13.65,17.35 45,17.5 46.25,17.5 47.5,17.5 48.75,17.5 50,17.5 21,18 22,18 23,18 24,18 25,18 26,18 27,18 28,18 29,18 30,18 31,18 32,18 33,18 34,18 35,18 36,18 37,18 38,18 45,18.75 46.25,18.75 47.5,18.75 48.75,18.75 50,18.75 21,19 22,19 23,19 24,19 25,19 26,19 27,19 28,19 29,19 30,19 31,19 32,19 33,19 34,19 35,19 36,19 37,19 38,19 21,20 22,20 23,20 24,20 25,20 26,20 27,20 28,20 29,20 30,20 31,20 32,20 33,20 34,20 35,20 36,20 37,20 38,20 39,20 46.75,20 49.75,20 44.5,20.75 45.75,20.75 21,21 22,21 23,21 24,21 25,21 26,21 27,21 28,21 29,21 30,21 31,21 32,21 33,21 34,21 35,21 36,21 37,21 38,21 39,21 40,21 43.5,21.25 20,22 21,22 22,22 23,22 24,22 25,22 26,22 27,22 28,22 29,22 30,22 31,22 32,22 33,22 34,22 35,22 36,22 37,22 38,22 39,22 40,22 41,22 42.75,22 45.75,22.25 45,22.5 42,22.75 19,23 20,23 21,23 22,23 23,23 24,23 25,23 26,23 27,23 28,23 29,23 30,23 31,23 32,23 33,23 34,23 35,23 36,23 37,23 38,23 39,23 40,23 41,23 46.75,23 49.75,23 44.25,23.25 18,24 19,24 20,24 21,24 22,24 23,24 24,24 25,24 26,24 27,24 28,24 29,24 30,24 31,24 32,24 33,24 34,24 35,24 36,24 37,24 38,24 39,24 40,24 41,24 43.5,24 13,24.25 42.75,24.75 18,25 19,25 20,25 21,25 22,25 23,25 24,25 25,25 26,25 27,25 28,25 29,25 30,25 31,25 32,25 33,25 34,25 35,25 36,25 37,25 38,25 39,25 40,25 42,25.5 11.15,25.9 18,26 19,26 20,26 21,26 22,26 23,26 24,26 25,26 26,26 27,26 28,26 29,26 30,26 31,26 32,26 33,26 34,26 35,26 36,26 37,26 38,26 41.25,26.25 40.5,26.75 18.4,27 20.6,27 23.4,27 25.6,27 27,27 28,27 29,27 30,27 31,27 32,27 33,27 34,27 35,27 36,27 39.75,27.25 3.25,27.5 4,27.5 15,27.6 39,27.75 38,28.25 37,28.75 20.6,29 23.4,29 25.6,29 27,29 28,29 29,29 30,29 31,29 32,29 33,29 34,29 35,29 36,29 10,29.4 11.15,29.4 14.75,29.4 5,29.5
GPIO0: J3.3 J4.38 | length 19
  01_Top w0.15: J4.38 17.05,13.748 17.252,13.748 17.419,13.581 18.871,5.344 18.882,5.283 20.136,4.405 27.161,4.405 27.25,4.316 J3.3
GPIO1: J3.4 J4.40 | length 19.9
  01_Top w0.15: J4.40 17.017,14.25 17.335,14.25 17.74,13.845 19.205,5.535 19.216,5.474 20.232,4.763 27.519,4.763 27.75,4.532 J3.4
GPIO2: J3.6 J4.42 | length 21.4
  01_Top w0.15: J4.42 16.984,14.752 17.424,14.752 18.06,14.116 19.539,5.726 19.55,5.665 20.387,5.079 28.37,5.079 28.75,4.699 J3.6
GPIO3: J3.7 J4.44 | length 22.2
  01_Top w0.15: J4.44 16.646,15.2 17.567,15.2 18.349,14.418 19.844,5.938 19.855,5.877 20.56,5.383 28.617,5.383 29.25,4.75 J3.7
GPIO4: J3.9 J4.46 | length 23.5
  01_Top w0.15: J4.46 16.602,15.7 17.617,15.7 18.656,14.661 20.158,6.143 20.169,6.082 20.723,5.694 29.198,5.694 30.25,4.642 J3.9
GPIO5: J3.10 J4.48 | length 24.4
  01_Top w0.15: J4.48 16.559,16.2 17.708,16.2 18.976,14.932 20.523,6.159 20.75,6 29.536,6 30.75,4.786 J3.10
LED1#: J1.44 J3.2 J4.6 R2.1 | length 36.6
  01_Top w0.15: v1(16.553,5.537) 16.66,4.929 16.66,2.876 16.862,1.732 R2.1 18.8,2.5 21.366,2.5 21.916,1.95 23.467,1.95 23.75,2.233 23.75,2.775 23.975,3 26.54,3 26.75,3.21 J3.2 ; v1@16.636,5.552 J4.6
  04_Bottom w0.15: J1.44 3.9,6.4 5.7,4.6 5.7,2.55 6.25,2 11,2 14.4,5.4 16,5.4 16.137,5.537 v1(16.553,5.537)
LED2#: J1.42 J3.1 J4.16 R3.1 | length 36.3
  01_Top w0.15: v1(16.55,6.2) 16.301,7.613 16.392,7.942 16.52,8.07 J4.16 17.744,8.286 17.752,8.287 17.913,8.287 18.046,8.154 18.612,4.947 22.106,2.5 R3.1 23.3,3.3 23.8,3.8 J3.1
  04_Bottom w0.15: J1.42 3.7,7.2 6.1,4.8 6.1,2.7 6.45,2.35 10.8,2.35 14.8,6.35 16.05,6.35 16.2,6.2 v1(16.55,6.2)
NetD1_C: D1.C R2.2 | length 1.3
  01_Top w0.15: R2.2 D1.C
NetD2_C: D2.C R3.2 | length 1.3
  01_Top w0.15: D2.C@24.2,1.26 R3.2
  01_Top w0.25: D2.C@24.2,1.26 D2.C
NetJ5_1: J5.1 J7.1 | length 23.4
  01_Top w0.15: J5.1 33.937,28 cw(c33.937,18.191) 40.873,25.127 43.557,22.443 ccw(c45.833,24.718) 45.833,21.5 J7.1
NetJ6_1: J6.1 J8.1 | length 16.2
  01_Top w0.15: J6.1 34,3.565 cw(c38.935,3.565) 38.935,8.5 J8.1
NetJ10_1: J10.1 J11.1 | length 2.2
  01_Top w0.15: J10.1 cw(c46.56,12.483) 46.56,15 J11.1
PCI_REF_CLK_N: J1.11 J4.49 | length 12.5
  01_Top w0.11: J1.11 2.299,22.8 2.559,22.54 3.156,22.54 4.964,20.732 5.874,15.572 6.754,14.692 7.199,14.692 7.577,14.758 J4.49
PCI_REF_CLK_P: J1.13 J4.47 | length 12.5
  01_Top w0.11: J1.13 2.299,22 2.559,22.26 3.04,22.26 4.703,20.597 5.613,15.437 6.638,14.412 7.247,14.412 7.247,14.416 7.626,14.483 J4.47
PCI_RX0_N: J1.31 J4.41 | length 13.8
  01_Top w0.11: J1.31 2.299,11.6 2.559,11.34 5.256,11.34 6.116,10.48 8.263,10.48 9.846,10.759 10.25,11.335 10.167,11.803 10.058,11.879 9.924,11.856 9.825,11.925 9.804,12.045 9.879,12.153 10.025,12.178 10.086,12.265 10.051,12.462 9.964,12.523 9.767,12.488 9.68,12.549 9.654,12.697 9.715,12.784 9.912,12.818 9.973,12.905 9.957,12.993 9.63,13.32 9.359,13.32 J4.41
PCI_RX0_P: J1.33 J4.43 | length 13.8
  01_Top w0.11: J1.33 2.299,10.8 2.559,11.06 5.14,11.06 6,10.2 8.287,10.2 10.009,10.504 10.545,11.269 10.244,12.98 10.218,13.128 9.746,13.6 9.012,13.6 J4.43
PCI_RX1_N: J1.47 J4.65 | length 25.3
  01_Top w0.11: J1.47 2.299,5.2 2.559,4.94 3.858,4.94 7.964,9.046 7.998,9.052 11.219,9.62 12.183,10.996 11.366,15.625 11.232,16.39 11.145,16.451 10.948,16.416 10.861,16.477 10.835,16.625 10.896,16.712 11.093,16.747 11.153,16.833 11.119,17.03 11.032,17.091 10.835,17.056 10.748,17.117 10.722,17.265 10.783,17.352 10.98,17.387 11.041,17.474 10.958,17.939 9.018,19.298 8.298,19.171 J4.65
PCI_RX1_P: J1.49 J4.67 | length 25.2
  01_Top w0.11: J1.49 2.299,4.4 2.559,4.66 3.974,4.66 8.1,8.786 11.382,9.365 12.479,10.931 11.214,18.102 9.083,19.594 8.25,19.446 J4.67
PCI_TX0_N: J1.23 J4.37 | length 8.7
  01_Top w0.11: J1.23 2.299,14.8 2.559,14.54 4.46,14.54 7.196,11.804 8.098,11.804 J4.37
PCI_TX0_P: J1.25 J4.35 | length 8.7
  01_Top w0.11: J1.25 2.299,14 2.559,14.26 4.344,14.26 7.08,11.524 8.122,11.524 8.146,11.528 J4.35
PCI_TX1_N: J1.39 J4.59 | length 20.7
  01_Top w0.11: J1.39 2.299,8.4 2.559,8.14 4.844,8.14 6.404,9.7 7.721,9.7 7.788,9.706 10.613,10.204 11.189,11.027 10.608,14.322 10.011,14.739 9.825,15.799 9.738,15.86 9.541,15.826 9.454,15.886 9.428,16.034 9.489,16.121 9.686,16.156 9.746,16.243 9.712,16.44 9.625,16.5 9.428,16.466 9.341,16.527 9.315,16.674 9.376,16.761 9.573,16.796 9.634,16.883 9.529,17.478 9.088,17.787 8.559,17.694 J4.59
PCI_TX1_P: J1.41 J4.61 | length 20.7
  01_Top w0.11: J1.41 2.299,7.6 2.559,7.86 4.96,7.86 6.52,9.42 7.779,9.42 10.775,9.948 11.485,10.962 10.864,14.484 10.267,14.902 9.784,17.641 9.153,18.083 8.51,17.969 J4.61
PERST#: J1.22 J4.52 | length 14.8
  01_Top w0.15: v1(13.861,16.74) J4.52
  04_Bottom w0.15: J1.22 3.45,15.2 4.35,16.1 8.9,16.1 13.221,16.1 v1(13.861,16.74)
PEWAKE#: J1.1 J4.55 | length 14.3
  01_Top w0.15: J1.1 2.8,26.8 3.75,25.85 3.75,24.5 4.25,24 4.25,23.2 6.022,21.428 6.868,16.632 7.177,16.323 J4.55
REFCLK1: C4.1 J9.1 R1.1 | length 1.9
  01_Top w0.15: C4.1 R1.1 J9.1
REFCLK1_N: C3.2 J4.73 | length 12.2
  01_Top w0.11: J4.73 7.989,20.924 8.37,20.991 9.064,21.685 12.402,26.452 14.54,28.59 15.39,28.59 C3.2
REFCLK1_P: C4.2 J4.71 | length 12.2
  01_Top w0.11: J4.71 8.038,20.648 8.505,20.73 9.279,21.504 9.907,22.401 12.617,26.271 14.656,28.31 15.39,28.31 C4.2
TCK: J2.5 J4.19 | length 28.4
  01_Top w0.15: J4.19 11.2,7.95 11.9,7.95 12.35,7.5 v1(12.35,7.45)
  04_Bottom w0.15: v1(12.35,7.45) 13.1,7.45 13.65,8 19.3,13.65 19.3,20.2 14.9,24.6 14.9,25.75 16.1,26.95 J2.5
TDI: J2.2 J4.21 | length 26.9
  01_Top w0.15: J4.21 10.7,8.35 12.1,8.35 v1(12.35,8.1)
  04_Bottom w0.15: v1(12.35,8.1) 12.35,8.85 18.4,14.9 18.4,19.827 14,24.227 14,25.75 12.8,26.95 J2.2
TDO: J2.1 J4.23 | length 28.7
  01_Top w0.15: J4.23 9.471,8.555 10.45,8.75 v1(13,8.75) v1@12.949,8.701
  04_Bottom w0.15: J2.1 12.8,28.55 14.45,26.9 14.45,24.414 18.85,20.014 18.85,14.6 v1(13,8.75)
TMS: J2.3 J4.17 | length 24.6
  01_Top w0.15: J4.17 10.55,7.3 v1(11.05,7.45)
  04_Bottom w0.15: v1(11.05,7.45) 11.05,8.3 17.95,15.2 17.95,19.641 13.55,24.041 13.55,24.6 12.8,25.35 J2.3
USB_D_N: J1.36 J4.5 | length 12.9
  01_Top w0.135: v1(8.715,3.986) 8.952,3.82 9.489,3.915 J4.5
  04_Bottom w0.135: J1.36 2.295,9.6 2.55,9.345 3.54,9.345 5.495,7.39 6.87,7.39 7.8,6.46 7.8,4.648 7.8,3.95 8.048,3.702 8.28,3.702 8.548,3.749 v1(8.715,3.986)
USB_D_P: J1.38 J4.3 | length 13
  01_Top w0.135: v1(8.836,3.297) 9.003,3.535 9.539,3.629 J4.3
  04_Bottom w0.135: J1.38 2.295,8.8 2.55,9.055 3.42,9.055 5.375,7.1 6.75,7.1 7.51,6.34 7.51,4.768 7.51,3.83 7.928,3.412 8.33,3.412 8.33,3.416 8.599,3.463 v1(8.836,3.297)
VCC1V8: C2.2 J2.4 J3.5 U1.4 U1.5 | length 39.4
  01_Top w0.3: 28.25,3.37 J3.5
  01_Top w0.45: v1(27.719,3.081) 27.961,3.081 28.25,3.37
  04_Bottom w0.45: J2.4 16.375,24.116 19.9,20.591 19.9,6.662 23.481,3.081
  04_Bottom w0.8: v1(15.6,0.8) v1(16.2,0.8) 21.2,0.8 23.481,3.081 v1(27.719,3.081)
VCC3V3: C1.2 D1.A D2.A J1.2 J1.52 J4.2 J4.4 J4.72 J4.74 U1.1 U1.3 | length 4.4
  01_Top w0.25: 5.499,3.226 5.645,3.372 5.645,4.18 C1.2 ; v1(21.2,2.1) 21.21,2.09 D1.A D2.A
  01_Top w0.4: U1.1 5.499,3.226
  other v1: 5.167,0.722 5.711,1.184 17.5,3.25 18.25,3.25 17.5,4 18.25,4 13.1,21.15 13.1,21.8 13.75,21.8 13.75,22.45
pads on no net: FID1.FID FID2.FID FID3.FID J1.3 J1.5 J1.6 J1.8 J1.10 J1.12 J1.14 J1.16 J1.17 J1.19 J1.20 J1.24 J1.28 J1.30 J1.32 J1.34 J1.46 J1.48 J4.8 J4.9 J4.10 J4.11 J4.12 J4.13 J4.14 J4.15 J4.20 J4.22 J4.32 J4.34 J4.36 J4.50 J4.54 J4.56 J4.58 J4.60 J4.62 J4.64 J4.66 J4.68 J4.70 J4.MH Mech1.MH

## Polygon pours and split planes (outlines as drawn)
GND on 01_Top "NONET_L-01_P-001" (solid, remove dead copper, pour order 10): 2.775,30 50.95,30 50.95,0 2.775,0
VCC1V8 on 01_Top "Direct" (solid, remove dead copper, pour order 1): 7.5,2 8.35,1.15 14.55,1.15 16.25,1.15 16.45,0.95 16.45,0.5 16.2,0.25 7.15,0.25 6.208,1.192 6.208,3.119 6.613,3.525 7.505,3.525
VCC3V3 on 01_Top "Direct" (solid, remove dead copper, pour order 6): 15.114,21.875 14.15,21.7 13.373,20.969 cw(c13.2,21.152) 13.2,20.9 13.05,20.9 cw(c13.05,21.1) 12.85,21.1 12.85,21.8 cw(c13.212,21.8) 12.956,22.056 13.494,22.594 cw(c13.75,22.338) 13.75,22.7 15.03,22.7 cw(c15.03,22.615) 15.113,22.631 15.225,22.036 cw(c15.09,22.01)
VCC3V3 on 01_Top "Direct" (solid, remove dead copper, pour order 5): 18.055,5.442 17.098,5.276 ccw(c17.128,5.1) 16.95,5.1 16.95,3.25 ccw(c17.2,3.25) 17.2,3 18.25,3 ccw(c18.25,3.25) 18.5,3.25 18.5,4.175 18.171,5.369 ccw(c18.072,5.341)
GND on 02_GND "NONET_L-01_P-001" (solid, remove dead copper, pour order 9): 2.75,30 50.95,30 50.95,0 2.75,0
GND on 02_GND "NONET_L-01_P-001" (solid, remove dead copper, pour order 7): 2.75,30 50.95,30 50.95,0 2.75,0
VCC3V3 on 04_Bottom "Direct" (solid, remove dead copper, pour order 4): 2.3,2.9 2.85,2.9 4,1.75 4,0.75 4.25,0.5 14.3,0.5 15.2,1.4 21.05,1.4 21.45,1.8 21.45,4.05 19.5,6 19.5,9.25 18.75,10 16.15,10 13.15,7 10.85,7 10.6,7.25 10.6,8.35 17.5,15.25 17.5,19.5 13.6,23.4 7.75,23.4 4.45,26.7 2.05,26.7 2.05,26.1 3.15,26.1 3.5,25.75 3.5,22.75 7.2,19.05 12.45,19.05 14.3,17.2 14.3,16.05 8.75,10.5 8.75,6.5 10.1,5.15 13.05,5.15 14.55,6.65 16.75,6.65 17,6.4 17,5.35 16.75,5.1 14.6,5.1 11.15,1.65 5.75,1.65 3.9,3.5 2.3,3.5
GND on 04_Bottom "NONET_L-01_P-001" (solid, remove dead copper, pour order 8): 2.775,30 50.95,30 50.95,0 2.775,0
GND on 03_GND "NONET_L-01_P-001" (solid, remove dead copper, pour order 3): 2.75,30 50.95,30 50.95,0 2.75,0

## Other copper
01_Top:
  pour cut-out: 45.8,15.35 46.5,16.05 47.4,16.05 47.4,13.95 46.5,13.95 45.8,14.65
  region net VCC3V3: 4.641,0.3 5.422,0.3 5.975,0.853 5.975,3.643 5.466,4.446 5.466,1.92 5.331,1.785 4.306,1.785 4.131,1.61 4.131,0.81
  region net NetJ6_1: 33.75,2.9 33.75,3.25 33.95,3.55 34.05,3.55 34.25,3.25 34.25,2.9
  pour cut-out: 45.85,21.85 46.55,22.55 47.45,22.55 47.45,20.45 46.55,20.45 45.85,21.15
  pour cut-out: 45.85,8.85 46.55,9.55 47.45,9.55 47.45,7.45 46.55,7.45 45.85,8.15
  region net NetJ6_1: 46.8,9 46.35,9 45.8,8.55 45.8,8.45 46.35,8 46.8,8
  region net NetJ5_1: 46.8,22 46.35,22 45.8,21.55 45.8,21.45 46.35,21 46.8,21
  region net NetJ5_1: 25.375,28.25 25.725,28.25 26.025,28.05 26.025,27.95 25.725,27.75 25.375,27.75
  region net REFCLK1: 18.6,28.25 18.25,28.25 17.95,28.05 17.95,27.95 18.25,27.75 18.6,27.75
  pour cut-out: 17.25,10.05 17.7,10.5 17.8,10.5
  pour cut-out: 16.95,11.9 17.45,11.9 17.5,11.95 17.5,12.05
  pour cut-out: 15.45,29.4 17.7,29.4 17.95,29.15 17.95,27.65 17.7,27.4 15.5,27.4 15.2,27.7 15.2,29.15
  pour cut-out: 8,20.5 8,19.75 8.75,19.75 8.75,20.5
  text "1" at 3.833,28.5 h1
02_GND:
  pour cut-out: 9.536,4.3 10.767,4.517 cw(c10.784,4.418) 10.883,4.436 11.022,3.648 cw(c10.923,3.63) 10.941,3.532 9.71,3.315 cw(c9.692,3.413) 9.594,3.396 9.455,4.184 cw(c9.553,4.201)
  pour cut-out: 7.886,13.655 9.117,13.872 cw(c9.135,13.774) 9.233,13.791 9.372,13.004 cw(c9.274,12.986) 9.291,12.888 8.06,12.671 cw(c8.043,12.769) 7.944,12.752 7.805,13.54 cw(c7.904,13.557)
  pour cut-out: 8.147,12.178 9.378,12.395 cw(c9.395,12.297) 9.494,12.314 9.633,11.526 cw(c9.534,11.509) 9.552,11.41 8.321,11.193 cw(c8.303,11.292) 8.205,11.275 8.066,12.062 cw(c8.164,12.08)
  pour cut-out: 7.626,15.133 8.857,15.35 cw(c8.874,15.251) 8.973,15.269 9.112,14.481 cw(c9.013,14.463) 9.031,14.365 7.8,14.148 cw(c7.782,14.246) 7.684,14.229 7.545,15.017 cw(c7.643,15.034)
  pour cut-out: 7.105,18.087 8.336,18.304 cw(c8.353,18.206) 8.452,18.223 8.591,17.435 cw(c8.492,17.418) 8.51,17.319 7.279,17.102 cw(c7.261,17.201) 7.163,17.183 7.024,17.971 cw(c7.122,17.989)
  pour cut-out: 6.845,19.564 8.076,19.781 cw(c8.093,19.683) 8.191,19.7 8.33,18.912 cw(c8.232,18.895) 8.249,18.797 7.018,18.579 cw(c7.001,18.678) 6.902,18.661 6.763,19.448 cw(c6.862,19.466)
  pour cut-out: 6.584,21.041 7.815,21.259 cw(c7.832,21.16) 7.931,21.177 8.07,20.39 cw(c7.971,20.372) 7.989,20.274 6.758,20.057 cw(c6.74,20.155) 6.642,20.138 6.503,20.926 cw(c6.601,20.943)
  pour cut-out: 47.25,22.35 47.25,22.2 cw(c47.15,22.2) 47.15,22.1 46.25,22.1 ccw(c46.25,22) 46.15,22 46.15,21 ccw(c46.25,21) 46.25,20.9 47.15,20.9 cw(c47.15,20.8) 47.25,20.8 47.25,20.65 ccw(c47.35,20.65) 47.35,20.55 49.15,20.55 ccw(c49.15,20.65) 49.25,20.65 49.25,22.35 ccw(c49.15,22.35) 49.15,22.45 47.35,22.45 ccw(c47.35,22.35)
  pour cut-out: 47.25,9.35 47.25,9.2 cw(c47.15,9.2) 47.15,9.1 46.25,9.1 ccw(c46.25,9) 46.15,9 46.15,8 ccw(c46.25,8) 46.25,7.9 47.15,7.9 cw(c47.15,7.8) 47.25,7.8 47.25,7.65 ccw(c47.35,7.65) 47.35,7.55 49.15,7.55 ccw(c49.15,7.65) 49.25,7.65 49.25,9.35 ccw(c49.15,9.35) 49.15,9.45 47.35,9.45 ccw(c47.35,9.35)
  pour cut-out: 33.3,1.35 33.3,2.65 cw(c33.4,2.65) 33.4,2.75 33.55,2.75 ccw(c33.55,2.85) 33.65,2.85 33.65,3.3 cw(c33.75,3.3) 33.75,3.4 34.25,3.4 cw(c34.25,3.3) 34.35,3.3 34.35,2.85 ccw(c34.45,2.85) 34.45,2.75 34.6,2.75 cw(c34.6,2.65) 34.7,2.65 34.7,1.35 cw(c34.6,1.35) 34.6,1.25 33.4,1.25 cw(c33.4,1.35)
  pour cut-out: 23.85,28.7 25.15,28.7 cw(c25.15,28.6) 25.25,28.6 25.25,28.45 ccw(c25.35,28.45) 25.35,28.35 25.8,28.35 cw(c25.8,28.25) 25.9,28.25 25.9,27.75 cw(c25.8,27.75) 25.8,27.65 25.35,27.65 ccw(c25.35,27.55) 25.25,27.55 25.25,27.4 cw(c25.15,27.4) 25.15,27.3 23.85,27.3 cw(c23.85,27.4) 23.75,27.4 23.75,28.6 cw(c23.85,28.6)
  pour cut-out: 15.3,29.2 15.3,27.7 ccw(c15.4,27.7) 15.4,27.6 18.65,27.6 cw(c18.65,27.5) 18.75,27.5 18.75,27.4 ccw(c18.85,27.4) 18.85,27.3 20.15,27.3 ccw(c20.15,27.4) 20.25,27.4 20.25,28.6 ccw(c20.15,28.6) 20.15,28.7 18.85,28.7 ccw(c18.85,28.6) 18.75,28.6 18.75,28.5 cw(c18.65,28.5) 18.65,28.4 16.2,28.4 cw(c16.2,28.5) 16.1,28.5 16.1,29.2 ccw(c16,29.2) 16,29.3 15.4,29.3 ccw(c15.4,29.2)
  text "2" at 3.667,28.5 h1
03_GND:
  text "3" at 3.667,28.5 h1
04_Bottom:
  text "4" at 4.333,28.5 h1
Multi-Layer:
  pour cut-out: 8.296,3.913 8.418,3.223 ccw(c8.836,3.297) 8.91,2.879 ccw(c8.836,3.297) 9.255,3.371 9.133,4.06 ccw(c8.715,3.986) 8.641,4.405 ccw(c8.715,3.986)

## Silkscreen, mask and mechanical layers (free items; w line width, h text height)
Top Overlay:
  text "CLK" at 12.256,27.996 h0.9
  text "REV.1" at 12.876,0.5 h0.9
Top Solder:
  region: 21.31,6.253 18.49,22.248 37.216,25.551 40.037,9.555
Bottom Solder:
  region: 21,8 24,4.5 28.5,4.5 29.5,3.5 29.5,0 50.95,0 50.95,30 19,30 19,23 21,21
  region: 23.133,6.574 20.313,22.57 37.216,25.551 40.037,9.555
  text "MPCIE_TO_M2E" at 40.748,27.583 h1
Board:
  lines w0.1: 0,2.15 2.4,2.15 cw(c2.4,1.35) 3.2,1.35 3.2,0 50.95,0 50.95,30 3.2,30 3.2,28.65 cw(c2.4,28.65) 2.4,27.85 0,27.85 0,19.6 3.25,19.6 cw(c3.25,18.85) 3.25,18.1 1.35,18.1 0,18.1 0,2.15
Drill Drawing:
  drawing of 424 lines, arcs and shapes, not listed
  text "1." at 0.15,102.75 h1.5
  text "Used material - S1000H" at 4.15,102.714 h1.5
  text "Stack-Up" at 91.007,101.75 h2
  text "Number of layers - 4" at 4.15,99 h1.5
  text "2." at 0.15,98.75 h1.5
  text "Silkscreen Top" at 111.4,98.143 h1
  text "Soldermask Top" at 111.4,96.167 h1
  text "Board thickness - 1.0mm +/-10%" at 4.15,94.822 h1.5
  text "3." at 0.15,94.75 h1.5
  text "Copper Plating" at 111.4,93.893 h1
  text "Layer 1 (43um)" at 71.95,92.572 h1
  text "Thickness of outer layer (Cu) - 43um include copper plating" at 4.15,90.857 h1.5
  text "4." at 0.15,90.75 h1.5
  text "Core" at 111.4,90.5 h1
  text "S1000H 1x3313 - 100um" at 119.4,90.5 h1
  text "Layer 2 (18um)" at 72.2,89.572 h1
  text "Prepreg" at 111.4,87.167 h1
  text "S1000HB 7628 (46) - 195um" at 119.4,87.072 h1
  text "Thickness of inner layers (Cu) - 18um" at 4.15,86.857 h1.5
  text "5." at 0.15,86.75 h1.5
  text "Core" at 111.4,85 h1
  text "S1000H 2x1506 - 300um" at 119.4,85 h1
  text "Prepreg" at 111.399,83.167 h1
  text "S1000HB 7628 (46) - 195um" at 119.399,83.072 h1
  text "Solder Mask - Two sides, Green" at 4.15,82.857 h1.5
  text "6." at 0.15,82.75 h1.5
  text "Layer 3 (18um)" at 72.2,80.572 h1
  text "Core" at 111.4,79.5 h1
  text "S1000H 1x3313 - 100um" at 119.4,79.5 h1
  text "7." at 0.15,78.75 h1.5
  text "Silkscreen - No" at 4.15,78.714 h1.5
  text "Layer 4 (43um)" at 72.042,77.572 h1
  text "Copper Plating" at 111.4,76.393 h1
  text "Type of coating - ENIG" at 4.15,74.964 h1.5
  text "8." at 0.15,74.75 h1.5
  text "Soldermask Top" at 111.4,74.167 h1
  text "Silkscreen Top" at 111.4,72.143 h1
  text "Edge Connector - Hard Gold Au 0,2-0,5um/Ni 5um" at 4.15,70.964 h1.5
  text "9." at 0.15,70.75 h1.5
  text "Electrical Test on both side (use Adapter_MPCIe_to_M2_E.ipc file)" at 4.15,66.857 h1.5
  text "10." at 0.15,66.75 h1.5
  text "Min dia of plated hole - 0.2mm" at 4.15,62.964 h1.5
  text "11." at 0.15,62.75 h1.5
  text "Min trace width/clearance - 0.1mm/0.1mm" at 4.15,58.822 h1.5
  text "12." at 0.15,58.75 h1.5
  text "Impedance control - Yes, see details" at 4.15,54.964 h1.5
  text "13." at 0.15,54.75 h1.5
  text "Impedance tolerance - 10%" at 4.15,51 h1.5
  text "14." at 0.15,50.75 h1.5
  text "15." at 0.15,46.75 h1.5
  text "Board dimensions -  50.95mm x 30mm" at 4.15,46.714 h1.5
  text "+" at 10.483,42.45 h0.5
  text "5ш" at 11.15,42.3 h0.75
  text "45ш" at 8.7,42.25 h0.75
  text "-" at 10.483,42.1 h0.5
  text "+" at 5.133,37.6 h0.5
  text "0.15" at 2.4,37.375 h0.75
  text "0.05 mm" at 5.738,37.375 h0.75
  text "-" at 5.133,37.25 h0.5
  text "Impedance Requirement Table" at 24.544,-6.7 h2
  text "Ref. Layer" at 26.246,-10.75 h1.5
  text "Trace" at 44.722,-11.25 h1.5
  text "Trace" at 57.746,-11.25 h1.5
  text "Ground" at 68.996,-11.25 h1.5
  text "Type" at 3.246,-12.75 h1.5
  text "Layer" at 13.746,-12.75 h1.5
  text "Impedance" at 78.746,-12.75 h1.5
  text "Width" at 44.746,-13.5 h1.5
  text "Separation" at 55.746,-13.5 h1.5
  text "Spacing" at 68.746,-13.5 h1.5
  text "Upper" at 23.996,-14.75 h1.5
  text "Lower" at 32.996,-14.75 h1.5
  text "-" at 25.982,-18.143 h1.5
  text "-" at 60.107,-18.143 h1.5
  text "1" at 16.321,-18.25 h1.5
  text "2" at 35.375,-18.25 h1.5
  text "0.150" at 44.629,-18.25 h1.5
  text "0.300" at 69.761,-18.25 h1.5
  text "50 Ohm" at 79.829,-18.25 h1.5
  text "Differential" at 0.355,-18.286 h1.5
  text "-" at 25.982,-21.143 h1.5
  text "-" at 71.857,-21.143 h1.5
  text "4" at 15.964,-21.25 h1.5
  text "3" at 35.375,-21.25 h1.5
  text "0.135" at 44.629,-21.25 h1.5
  text "0.155" at 58.129,-21.25 h1.5
  text "90 Ohm" at 79.829,-21.25 h1.5
  text "Differential" at 0.355,-21.286 h1.5
  text "-" at 25.982,-24.143 h1.5
  text "-" at 71.857,-24.143 h1.5
  text "1" at 16.321,-24.25 h1.5
  text "2" at 35.375,-24.25 h1.5
  text "0.110" at 44.747,-24.25 h1.5
  text "0.170" at 58.129,-24.25 h1.5
  text "100 Ohm" at 79.28,-24.25 h1.5
  text "Differential" at 0.355,-24.286 h1.5
  text "Symbol" at 2.25,-34.375 h1.8
  text "Hole Size" at 13.37,-34.375 h1.8
  text "Plated" at 27.12,-34.375 h1.8
  text "Drill Layer Pair" at 36.723,-34.375 h1.8
  text "Count" at 63.973,-34.375 h1.8
  text "0.200mm" at 13.37,-38.125 h1.5
  text "PTH" at 27.12,-38.125 h1.5
  text "01_Top - 04_Bottom" at 36.723,-38.125 h1.5
  text "585" at 63.973,-38.125 h1.5
  text "1.100mm" at 13.37,-41.875 h1.5
  text "NPTH" at 27.12,-41.875 h1.5
  text "01_Top - 04_Bottom" at 36.723,-41.875 h1.5
  text "1" at 63.973,-41.875 h1.5
  text "1.600mm" at 13.37,-45.625 h1.5
  text "NPTH" at 27.12,-45.625 h1.5
  text "01_Top - 04_Bottom" at 36.723,-45.625 h1.5
  text "1" at 63.973,-45.625 h1.5
  text "2.600mm" at 13.37,-49.375 h1.5
  text "PTH" at 27.12,-49.375 h1.5
  text "01_Top - 04_Bottom" at 36.723,-49.375 h1.5
  text "3" at 63.973,-49.375 h1.5
  text "3.200mm" at 13.37,-53.125 h1.5
  text "NPTH" at 27.12,-53.125 h1.5
  text "01_Top - 04_Bottom" at 36.723,-53.125 h1.5
  text "2" at 63.973,-53.125 h1.5
Info:
  lines w0.1: 16.774,24.869 39.671,28.906 43.491,7.241 20.594,3.203
  text "TOP" at 21.329,31.5 h3
  text "BOTTOM" at 32.82,31.5 h3

## Text inside footprints (layer, text, board x,y; h text height)
J1: Info "5ш" at 11.15,40.3 h0.75; Info "+" at 10.483,40.45 h0.5; Info "20ш" at 8.7,40.25 h0.75; Info "-" at 10.483,40.1 h0.5; Info "+" at 4.933,35.6 h0.5; Info "0.25 mm" at 5.538,35.375 h0.75; Info "-" at 4.933,35.25 h0.5; Info "0.3" at 2.713,35.375 h0.75
J3: Info "FFC Edge" at 27.563,2.1 h0.25